# Altium PCB H01R0.PcbDoc (part 2 of 2)
Units mil, origin at the board's own origin, x right, y up, seen from the top; angles counter-clockwise.
Board outline 2362.2 x 1363.78 mil, 2 copper layers (Top Layer, Bottom Layer); 56 components, 39 nets, 159 pads, 0 vias.
Unrouted connection lines stored in the file: 98.
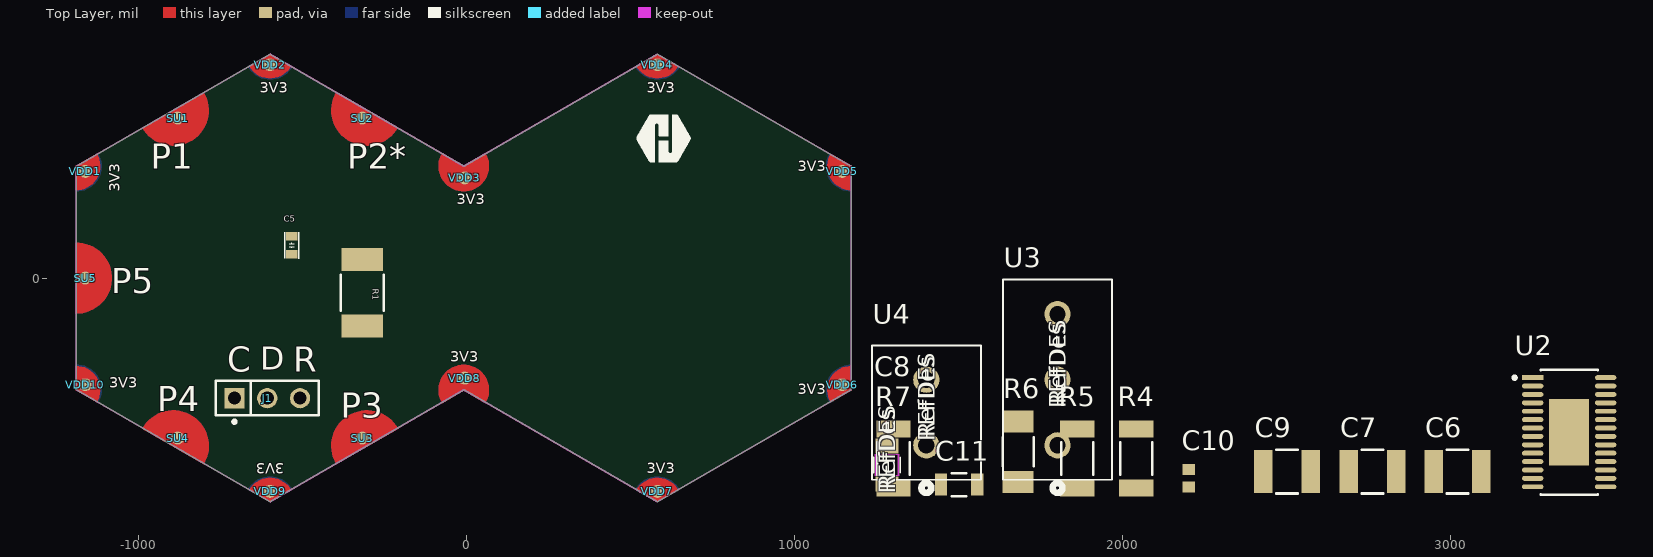
[diagram p0: Top Layer view]

## Silkscreen, mask and mechanical layers (free items; w line width, h text height) (continued)
Top Overlay: (continued)
  text "3V3" at 549,-594.99 h32
Bottom Overlay:
  text "GND" at -631,594.99 h32 r180
  text "GND" at 549,594.99 h32 r180
  text "P1" at -710,414.02 h76
  text "H01R00" at 422.73,392.16 h70
  text "P2*" at -224,334.02 h76
  text "GND" at 1083,325.01 h32
  text "GND" at -1105.01,277 h32 r90
  text "GND" at -51,254.99 h32 r180
  text "P5" at -984,-45.98 h76
  text "GND" at -51,-225.01 h32 r180
  text "GND" at -997,-334.99 h32
  text "GND" at 1083,-354.99 h32
  text "P4" at -824,-405.98 h76
  text "P3" at -424,-505.98 h76
  text "GND" at 549,-545.01 h32 r180
  text "GND" at -651,-565.01 h32 r180
Top Solder:
  drawing of 17 lines, arcs and shapes, not listed
Bottom Solder:
  drawing of 17 lines, arcs and shapes, not listed
Dimensions:
  lines w3.94: -3.06,-340.94 -593.61,-681.89 -1184.16,-340.94 -1184.16,340.94 -593.61,681.89 -3.06,340.94

## Text inside footprints (layer, text, board x,y; h text height)
C2: Mechanical 32 "2" at -774,266.5 h25 r270; Mechanical 32 "1" at -774,193.5 h25 r270; Mechanical 33 "C40" at -781.17,313.5 h25 r270
C4: Mechanical 32 "2" at -859,213.5 h25 r90; Mechanical 32 "1" at -859,286.5 h25 r90; Mechanical 33 "C40" at -851.83,166.5 h25 r90
C8: Top Overlay "REFDES" at 1306,-657.5 h50 r90; Top Overlay "RefDes" at 1306,-645 h50 r90; Mechanical 13 "RefDes2" at 1306,-657.5 h50 r90
U3: Top Overlay "REFDES" at 1826,-397.5 h50 r90; Top Overlay "RefDes" at 1826,-385 h50 r90; Mechanical 13 "RefDes2" at 1826,-397.5 h50 r90
U4: Top Overlay "REFDES" at 1426,-497.5 h50 r90; Top Overlay "RefDes" at 1426,-485 h50 r90; Mechanical 13 "RefDes2" at 1426,-497.5 h50 r90